# EAGLE board quadrotor (EAGLE 7.7.0)
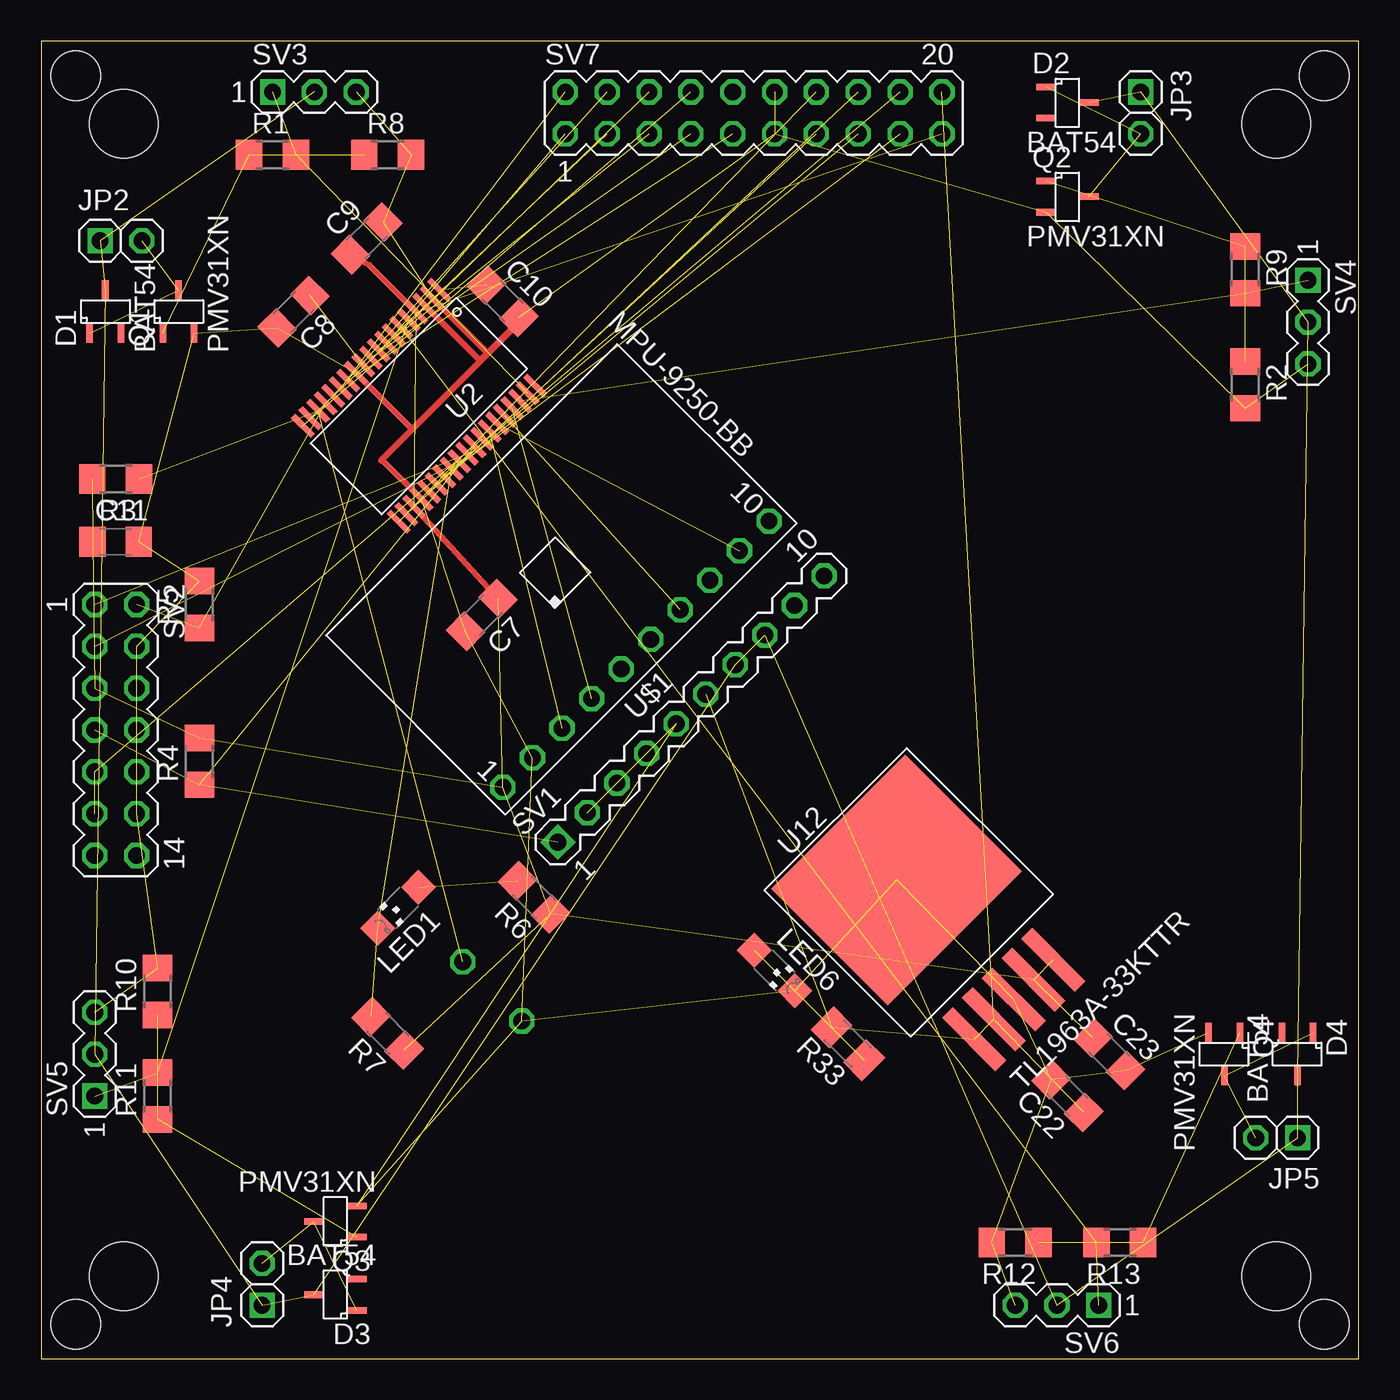
[diagram p0: board, top side]
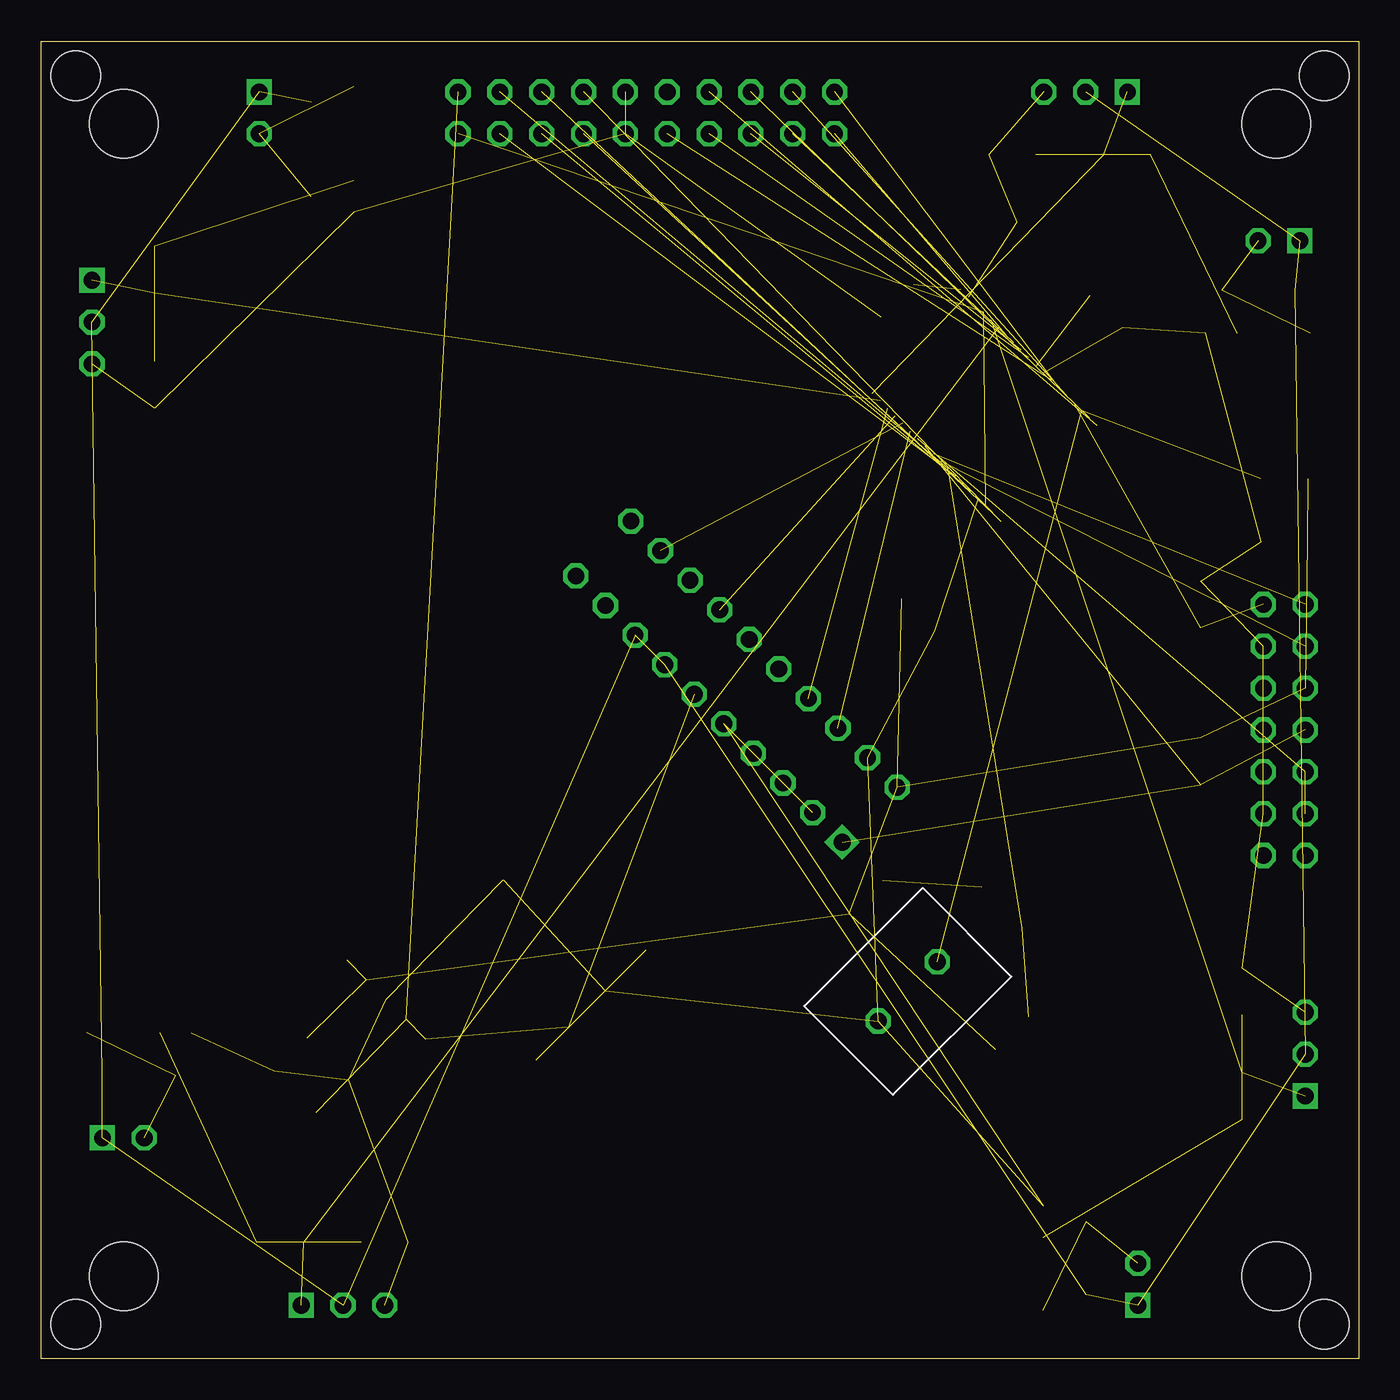
[diagram p1: board, bottom side, seen from below]

Size 80 x 80 mm. Coordinates in mm from the lower left corner, seen from the top.
Outline: 0,0 80,0 80,80 0,80 0,0
Copper layers (1*16): Top 0.035mm / dielectric 1.5mm / Bottom 0.035mm
Design rules "default *": minimum track width 8mil, minimum drill 20mil, track to track 8mil, track to pad 8mil, pad to pad 8mil, via to via 8mil, smd to smd 8mil, copper to edge 40mil, drill to drill 8mil, minimum pad ring 10mil, minimum via ring 8mil, stop-mask expansion 4mil, vias tented up to drill 0mil, thermal gap 10mil
Net classes: 0 default: width 0.203 mm, drill 0.508 mm, clearance 0.203 mm; 1 supply: width 0.61 mm, drill 0.508 mm, clearance 0.203 mm
Holes 3 mm at 2.1,77.9 77.9,77.9 77.9,2.1 2.1,2.1
Holes 4.15 mm at 5,75 75,75 75,5 5,5

## Footprints (pad centres in the part's own frame; a part is rotated, then mirrored left to right if it is on the bottom)
C1206 = smd 1.6 x 1.8: 1 -1.4,0; 2 1.4,0
SOT23 = smd 0.4 x 1.2: 1 -0.95,-1.3; 2 0.95,-1.3; 3 0,1.3
1X02 = drill 1.016 square: 1 -1.27,0 | drill 1.016 octagon: 2 1.27,0
CHIPLED_1206 = smd 1.5 x 1.5: A 0,-1.75; C 0,1.75
TH_PUSHBUTTON = drill 1.016 octagon: 1 0,2.54; 2 0,-2.54
R1206 = smd 1.6 x 1.803: 1 -1.422,0; 2 1.422,0
M1206 = smd 1.6 x 2: 1 -1.4,0; 2 1.4,0
MA10-1 = drill 1.016 square: 1 -11.43,0 | drill 1.016 octagon: 2 -8.89,0; 3 -6.35,0; 4 -3.81,0; 5 -1.27,0; 6 1.27,0; 7 3.81,0; 8 6.35,0; 9 8.89,0; 10 11.43,0
MA07-2 = drill 1.016 octagon: 1 -7.62,-1.27; 2 -7.62,1.27; 3 -5.08,-1.27; 4 -5.08,1.27; 5 -2.54,-1.27; 6 -2.54,1.27; 7 0,-1.27; 8 0,1.27; 9 2.54,-1.27; 10 2.54,1.27; 11 5.08,-1.27; 12 5.08,1.27; 13 7.62,-1.27; 14 7.62,1.27
MA03-1 = drill 1.016 square: 1 -2.54,0 | drill 1.016 octagon: 2 0,0; 3 2.54,0
MA10-2 = drill 1.016 octagon: 1 -11.43,-1.27; 2 -11.43,1.27; 3 -8.89,-1.27; 4 -8.89,1.27; 5 -6.35,-1.27; 6 -6.35,1.27; 7 -3.81,-1.27; 8 -3.81,1.27; 9 -1.27,-1.27; 10 -1.27,1.27; 11 1.27,-1.27; 12 1.27,1.27; 13 3.81,-1.27; 14 3.81,1.27; 15 6.35,-1.27; 16 6.35,1.27; 17 8.89,-1.27; 18 8.89,1.27; 19 11.43,-1.27; 20 11.43,1.27
DA38 = smd 0.35 x 1.705: 1 -5.85,-4.12; 2 -5.2,-4.12; 3 -4.55,-4.12; 4 -3.9,-4.12; 5 -3.25,-4.12; 6 -2.6,-4.12; 7 -1.95,-4.12; 8 -1.3,-4.12; 9 -0.65,-4.12; 10 0,-4.12; 11 0.65,-4.12; 12 1.3,-4.12; 13 1.95,-4.12; 14 2.6,-4.12; 15 3.25,-4.12; 16 3.9,-4.12; 17 4.55,-4.12; 18 5.2,-4.12; 19 5.85,-4.12; 20 5.85,4.12; 21 5.2,4.12; 22 4.55,4.12; 23 3.9,4.12; 24 3.25,4.12; 25 2.6,4.12; 26 1.95,4.12; 27 1.3,4.12; 28 0.65,4.12; 29 0,4.12; 30 -0.65,4.12; 31 -1.3,4.12; 32 -1.95,4.12; 33 -2.6,4.12; 34 -3.25,4.12; 35 -3.9,4.12; 36 -4.55,4.12; 37 -5.2,4.12; 38 -5.85,4.12
TL1963AKTTR = smd 0.914 x 4.572: P$1 -3.81,-10.16; P$2 -2.108,-10.16; P$3 -0.406,-10.16; P$4 1.295,-10.16; P$5 2.997,-10.16 | smd 11.5 x 10: P$6 -0.3,0
MPU-9250-BB = drill 1.016 octagon: 1 -11.434,-6.96; 2 -8.894,-6.96; 3 -6.354,-6.96; 4 -3.814,-6.96; 5 -1.274,-6.96; 6 1.266,-6.96; 7 3.806,-6.96; 8 6.346,-6.96; 9 8.886,-6.96; 10 11.426,-6.96

## Placement (x,y rotation side)
C7  2.2uF  [C1206]  26.75,45.16 225 top
C8  2.2uF  [C1206]  15.32,63.58 225 top
C9  2.2uF  [C1206]  19.77,68.03 45 top
C10  2.2uF  [C1206]  28.02,64.22 315 top
C11  0.1uF  [C1206]  4.53,49.61 0 top
C22  10 uF  [C1206]  62.31,15.95 135 top
C23  10 uF  [C1206]  64.85,18.5 315 top
D1  BAT54  [SOT23]  3.89,63.58 0 top
D2  BAT54  [SOT23]  62.31,76.28 270 top
D3  BAT54  [SOT23]  17.86,3.89 90 top
D4  BAT54  [SOT23]  76.28,18.5 180 top
JP2  [1X02]  4.85,67.89 0 top
JP3  [1X02]  66.75,75.64 270 top
JP4  [1X02]  13.41,4.53 90 top
JP5  [1X02]  75.01,13.41 180 top
LED1  [CHIPLED_1206]  21.67,27.38 135 top
LED6  [CHIPLED_1206]  44.53,23.57 225 top
P1  [TH_PUSHBUTTON]  27.38,22.3 315 bottom
Q1  PMV31XN  [SOT23]  8.34,63.58 0 top
Q2  PMV31XN  [SOT23]  62.31,70.56 270 top
Q3  PMV31XN  [SOT23]  17.86,8.34 90 top
Q4  PMV31XN  [SOT23]  71.83,18.5 180 top
R1  100  [R1206]  14.05,73.11 0 top
R2  10k  [R1206]  73.11,59.14 270 top
R3  4.7k  [R1206]  4.53,53.42 180 top
R4  4.7k  [R1206]  9.61,36.27 90 top
R5  4.7k  [R1206]  9.61,45.8 90 top
R6  1k  [R1206]  29.92,28.02 135 top
R7  4.7k  [R1206]  21.04,19.77 135 top
R8  10k  [R1206]  21.04,73.11 0 top
R9  100  [R1206]  73.11,66.12 270 top
R10  10k  [R1206]  7.06,22.3 90 top
R11  100  [R1206]  7.06,15.95 90 top
R12  10k  [R1206]  59.14,7.06 180 top
R13  100  [R1206]  65.48,7.06 180 top
R33  470  [M1206]  48.98,19.13 135 top
SV1  [MA10-1]  39.45,39.45 45 top
SV2  [MA07-2]  4.53,38.18 270 top
SV3  [MA03-1]  16.59,76.92 0 top
SV4  [MA03-1]  76.92,62.94 270 top
SV5  [MA03-1]  3.26,18.5 90 top
SV6  [MA03-1]  61.67,3.26 180 top
SV7  [MA10-2]  43.26,75.64 0 top
U2  TMS320F28027DAS  [DA38]  22.94,57.87 225 top
U12  TL1963A-33KTTR  [TL1963AKTTR]  52.15,29.29 45 top
U$1  MPU-9250-BB  [MPU-9250-BB]  31.2,47.7 45 top

## Library data of the parts
C7-C11 C22 C23 R1-R13 R33 = rcl
D1-D4 P1 Q1-Q4 U2 = SE423EagleLibrary
JP2-JP5 = pinhead
LED1 LED6 = led
SV1-SV7 = con-lstb; OC_FARNELL: unknown; OC_NEWARK: unknown
U12 = custom4
U$1 = MPU-9250_Breakoutboard

## Nets
+3V3 [supply]: C7.1 C9.1 C11.1 C23.1 R3.2 R4.2 R6.1 R7.1 SV2.5 SV7.19 U2.4 U2.22 U12.P$4 U12.P$5 U$1.1
/SPISTEA: U2.33 U$1.9
ADCA0: SV7.16 U2.21
ADCA2: SV7.14 U2.20
ADCA4: SV7.8 U2.19
ADCA6: SV7.6 U2.18
ADCB2: SV7.13 U2.24
ADCB4: SV7.15 U2.25
ADCB6: SV7.17 U2.26
ASCL: U$1.6
ASDA: U$1.5
FSYNC: U$1.10
GND [supply]: C7.2 C8.2 C9.2 C10.2 C11.2 C22.2 C23.2 LED6.C P1.2 Q1.2 Q2.2 Q3.2 Q4.2 R2.2 R5.2 R8.2 R10.2 R12.2 SV1.2 SV1.3 SV1.4 SV1.5 SV2.4 SV2.8 SV2.10 SV2.12 SV3.3 SV4.3 SV5.3 SV6.3 SV7.11 SV7.12 U2.2 U2.3 U2.12 U2.23 U12.P$3 U12.P$6 U$1.2
GPIO0: R1.2 SV3.1 U2.37
GPIO1: R9.2 SV4.1 U2.36
GPIO2: R11.2 SV5.1 U2.5
GPIO3: R13.2 SV6.1 U2.6
GPIO4: SV7.1 U2.7
GPIO5: SV7.3 U2.8
GPIO6: SV7.5 U2.9
GPIO7: SV7.7 U2.10
GPIO12: SV7.9 U2.13
GPIO34: LED1.C R7.2 SV7.18 U2.27
INT: U$1.8
MOTOR_PWR [supply]: D1.3 D2.3 D3.3 D4.3 JP2.1 JP3.1 JP4.1 JP5.1 SV1.7 SV1.8 SV3.2 SV4.2 SV5.2 SV6.2
N$1: LED1.A R6.2
N$2: Q1.1 R1.1 R8.1
N$3: C8.1 U2.11
N$5: Q3.1 R10.1 R11.1
N$6: Q2.1 R2.1 R9.1
N$7: Q4.1 R12.1 R13.1
N$8 [supply]: D1.1 JP2.2 Q1.3
N$10 [supply]: D2.1 JP3.2 Q2.3
N$12 [supply]: D3.1 JP4.2 Q3.3
N$14 [supply]: D4.1 JP5.2 Q4.3
N$15: SV7.10
N$21: C10.1 U2.1
N$35: P1.1 R3.1 U2.17
N$57: LED6.A R33.1
RXD_TF232RL: SV1.9
SCL: SV7.4 U2.15
SDA: SV7.2 U2.14
SPICLKA: U2.32 U$1.3
SPISIMOA: U2.35 U$1.4
SPISOMIA: U2.34 U$1.7
TCK: SV2.9 SV2.11 U2.31
TDI: SV2.3 U2.28
TDO: R4.1 SV1.1 SV2.7 U2.30
TMS: SV2.1 U2.29
TRSTN: R5.1 SV2.2 U2.16
TXD_FT232RL: SV1.10
V+ [supply]: C22.1 R33.2 SV1.6 SV7.20 U12.P$1 U12.P$2

## Tracks (layer width: path | path; a pad name or v marks a point on that pad's centre or on a via)
+3V3  (12 unrouted)
  Top 0.356: U2.22 C7.1 | U2.4 19.92,66.4 C9.1
/SPISTEA  (1 unrouted)
ADCA0  (1 unrouted)
ADCA2  (1 unrouted)
ADCA4  (1 unrouted)
ADCA6  (1 unrouted)
ADCB2  (1 unrouted)
ADCB4  (1 unrouted)
ADCB6  (1 unrouted)
GND  (34 unrouted)
  Top 0.356: 27.16,61.12 29.01,62.97 C10.2 29.01,62.92 22.5,56.4 | 27.16,61.12 27.04,61.12 U2.2 | 27.16,61.12 26.73,60.68 26.55,60.68 U2.3 | 22.5,56.4 20.63,54.54 20.75,54.54 U2.23 | U2.12 22.5,56.47 22.5,56.4
GPIO0  (2 unrouted)
GPIO1  (2 unrouted)
GPIO2  (2 unrouted)
GPIO3  (2 unrouted)
GPIO4  (1 unrouted)
GPIO5  (1 unrouted)
GPIO6  (1 unrouted)
GPIO7  (1 unrouted)
GPIO12  (1 unrouted)
GPIO34  (3 unrouted)
MOTOR_PWR  (13 unrouted)
N$1  (1 unrouted)
N$2  (2 unrouted)
N$3  (1 unrouted)
N$5  (2 unrouted)
N$6  (2 unrouted)
N$7  (2 unrouted)
N$8  (2 unrouted)
N$10  (2 unrouted)
N$12  (2 unrouted)
N$14  (2 unrouted)
N$21  (1 unrouted)
N$35  (2 unrouted)
N$57  (1 unrouted)
SCL  (1 unrouted)
SDA  (1 unrouted)
SPICLKA  (1 unrouted)
SPISIMOA  (1 unrouted)
SPISOMIA  (1 unrouted)
TCK  (2 unrouted)
TDI  (1 unrouted)
TDO  (3 unrouted)
TMS  (1 unrouted)
TRSTN  (2 unrouted)
V+  (5 unrouted)